# Altium PCB MB1180.PcbDoc
Units mil, origin at the board's own origin, x right, y up, seen from the top; angles counter-clockwise.
Board outline 730 x 1980 mil, 4 copper layers (Top Layer, GND, PWR, Bottom Layer); 91 components, 82 nets, 344 pads, 162 vias.
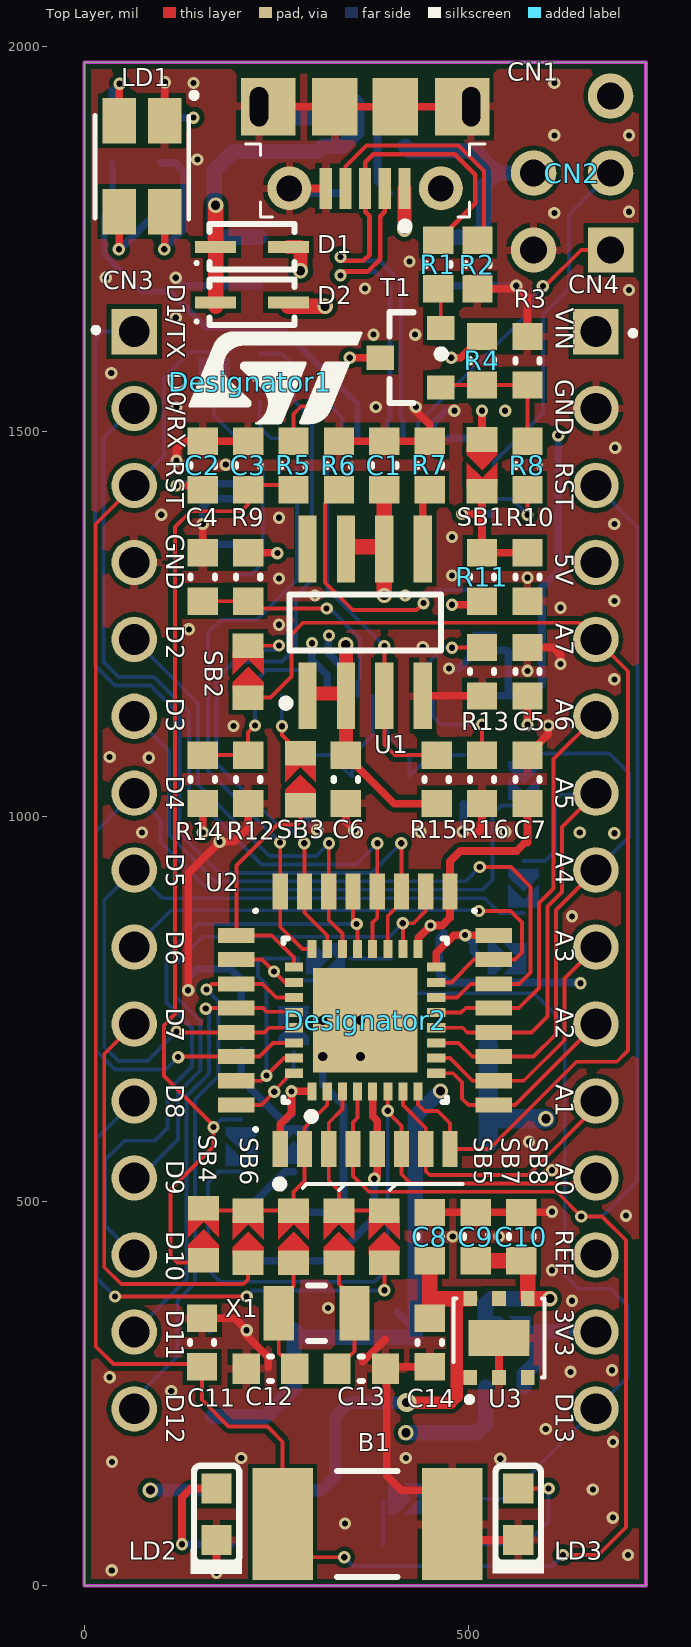
[diagram p0: Top Layer view]
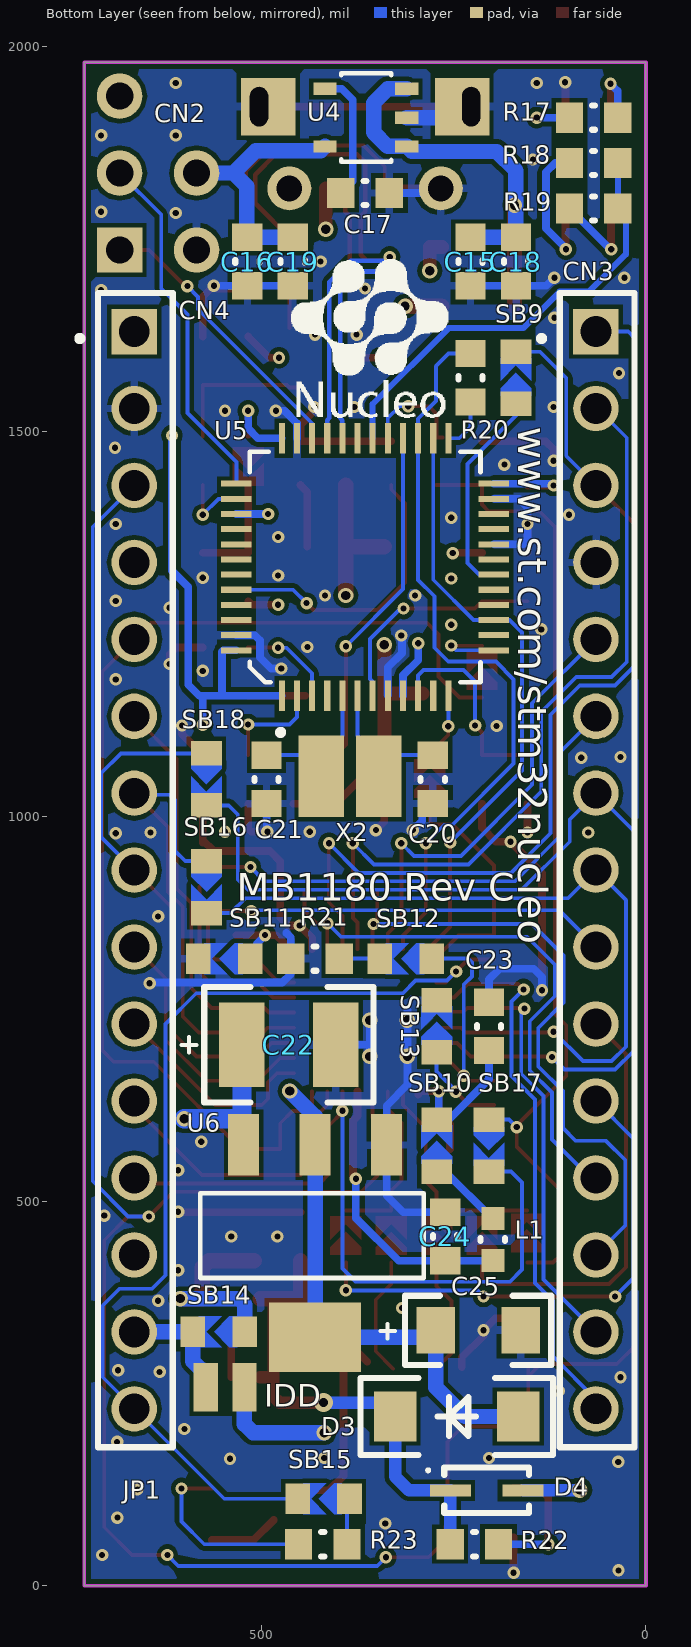
[diagram p1: Bottom Layer view, seen from below]
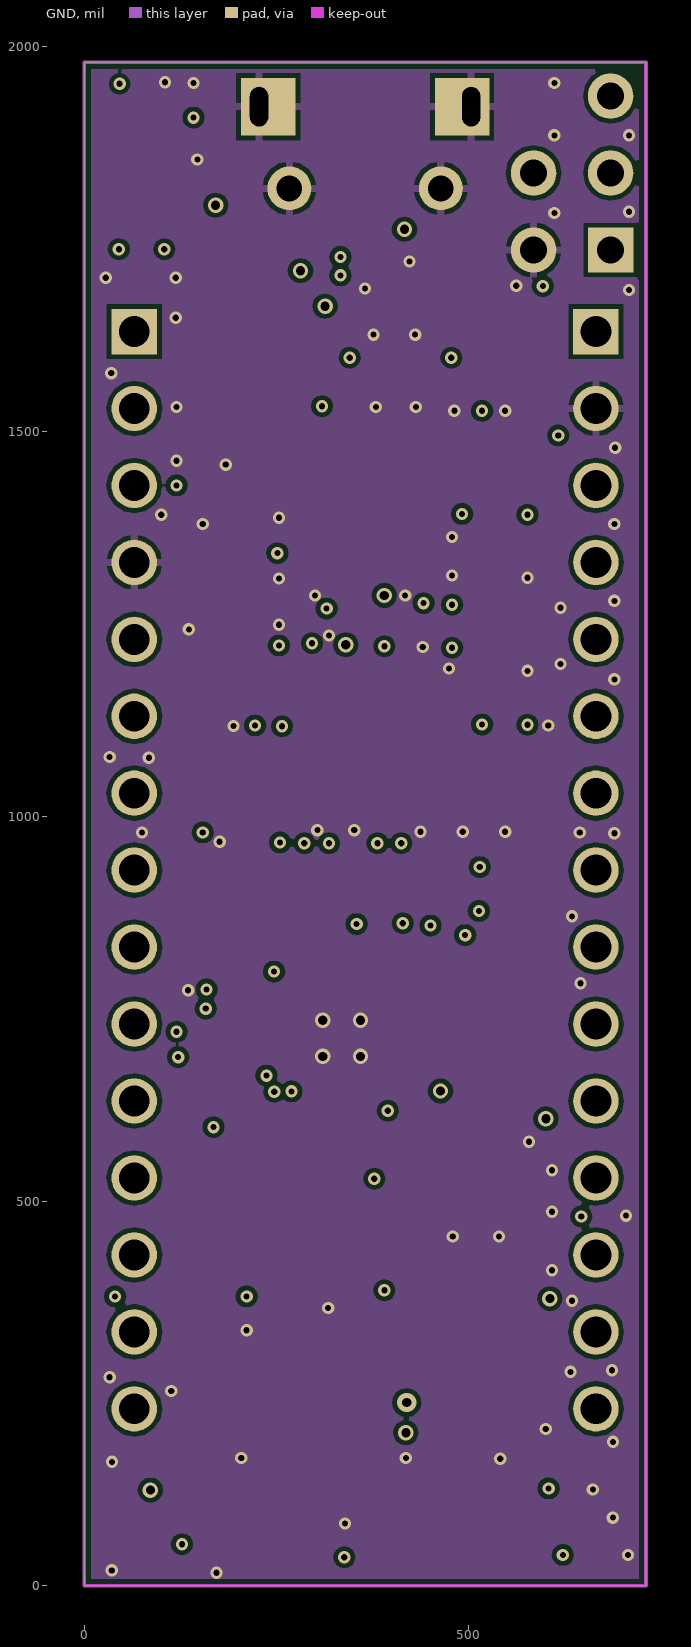
[diagram p2: GND]
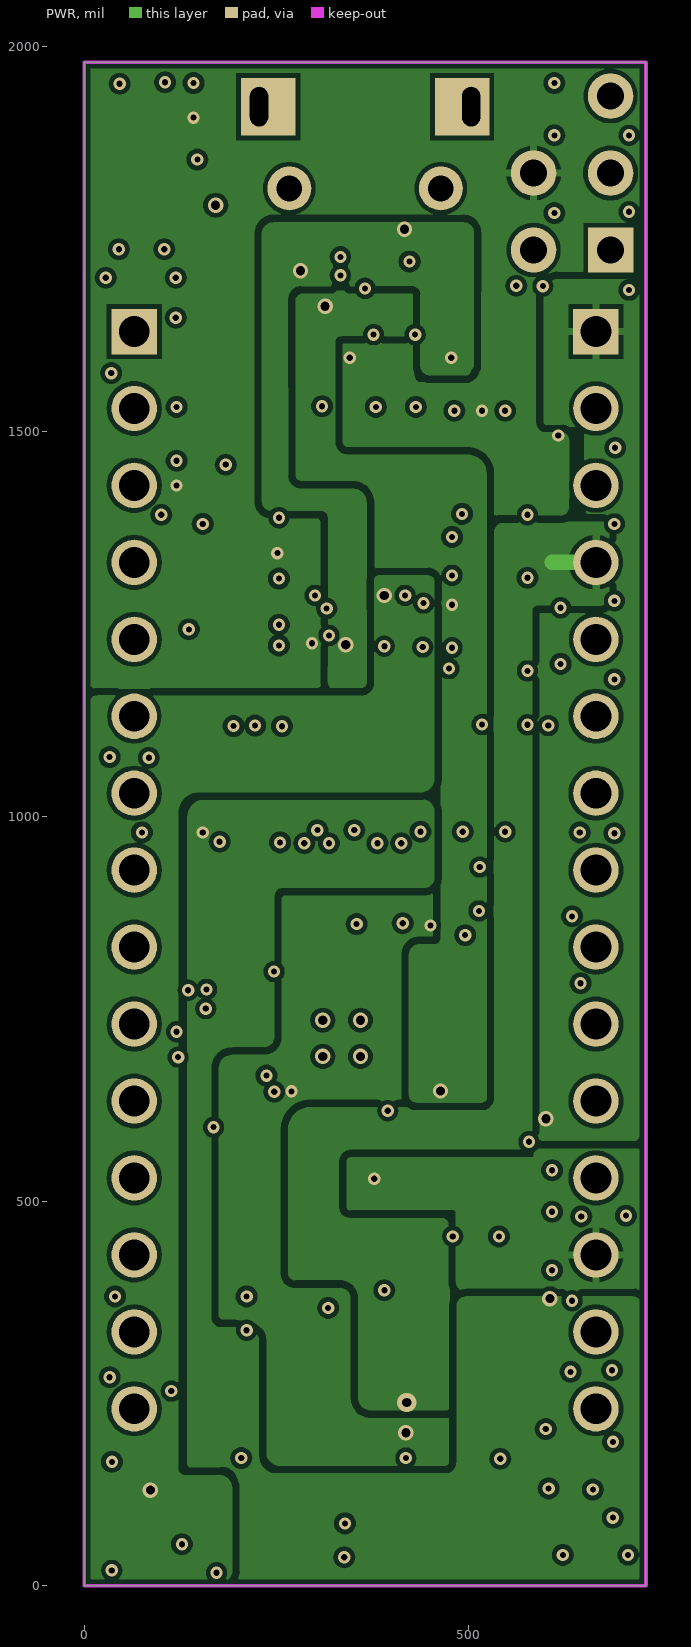
[diagram p3: PWR]

## Layer stack, top to bottom
Top Layer: signal copper 1.4
Dielectric: core 12.6, FR-4, Dk 4.8
GND: signal copper 1.4
Dielectric: prepreg 12.6, FR-4, Dk 4.8
PWR: signal copper 1.4
Dielectric: core 12.6, FR-4, Dk 4.8
Bottom Layer: signal copper 1.4

## Board outline
0,0 730,0 730,1980 0,1980

## Design rules (kind name [scope] priority, off if disabled: settings)
Clearance pad [(ObjectKind = 'Pad') And (Component = 'B1') vs (ObjectKind = 'Track') And (Layer = 'KeepOutLayer')] p1: gap=4
Clearance Polygon [(InPoly) vs (InPoly)] p2: gap=10
Clearance SB [HasFootprint('SB_DIP')] p3: gap=5
Clearance [All] p4: gap=6
Clearance Keepout [(InPoly) vs (ObjectKind = 'Track') And (Layer = 'KeepOutLayer')] p5: gap=4
DiffPairsRouting [All] p1: maxlimit=10 minlimit=6 mostfreqgap=10 toplayer_prefgap=8 midlayer1_mingap=10 midlayer2_mingap=10 bottomlayer_prefgap=8 maxuncoupledlength=500
FabricationTestPointUsage TestPointUsage [All] p1: valid=0 allowmultiple=FALSE
FabricationTestpoint Testpoint [(IsPad And (OnTopLayer Or OnBottomLayer))] p1: side=3 testpointundercomponent=TRUE minsize=40 maxsize=100 preferedsize=60 minholesize=0 maxholesize=40 preferedholesize=32 testpointgrid=1 allowsidetop=TRUE allowsidebottom=TRUE usegrid=TRUE gridtolerance=0.01
HoleSize [All] p1: absolutevalues=TRUE maxlimit=150 minlimit=1 maxpercent=80.000 minpercent=20.000
MinimumSolderMaskSliver [All] p1: minsoldermaskwidth=0
PolygonConnect PolygonConnect_1 [IsVia] p1: connectstyle=Direct reliefconductorwidth=20 reliefentries=4 polygonreliefangle="90 Angle"
PolygonConnect [All] p2: connectstyle=Relief reliefconductorwidth=10 reliefentries=4 polygonreliefangle="90 Angle"
RoutingLayers [All] p1: top layer_v5=FALSE mid layer 1_v5=FALSE mid layer 2_v5=FALSE bottom layer_v5=FALSE
RoutingVias [All] p1: holewidth=8 width=16 viastyle="Through Hole" minholewidth=8 minwidth=16 maxholewidth=28 maxwidth=50
SilkToSilkClearance [All] p1: silktosilkclearance=4
SilkscreenOverComponentPads [All] p1: minsilkscreentomaskgap=4
SolderMaskExpansion [All] p1: expansion=4
Width Width_1 [InNet('VDD_MCU')] p1: maxlimit=100 minlimit=8 preferedwidth=10 minimp=50.000000 maximp=50.000000 favimp=50.000000
Width [All] p2: maxlimit=100 minlimit=5 preferedwidth=10 toplayer_prefwidth=5 midlayer1_minwidth=6 midlayer2_minwidth=6 bottomlayer_prefwidth=5 minimp=50.000000 maximp=50.000000 favimp=50.000000
20 further rules are at their usual default settings.

## Classes and differential pairs
component class U_ST_LINK_V2-1: C1 C2 C3 C4 C5 C6 C15 C16 C17 C18 C19 C20 C21 C103 C104 CN1 CN2 CN11 CN12 D1 D2 JP4 LD1 LD10 R1 R2 R3 R4 R5 R6 R7 R8 R9 R10 R11 R12 R13 R14 R15 R16 R17 R18 R19 R20 R24 R25 R26 R27 R91 R123 R194 SB1 SB2 SB3 SB9 T1 U1 U4 U5 U23 X2
component class U_MCU_32: B1 B2 C7 C8 C9 C10 C11 C12 C13 C14 C22 C23 C24 C25 C27 C30 C33 C34 CN3 CN4 D3 D4 JP1 JP2 JP3 JP6 L1 LD2 LD3 R21 R22 R23 R31 R32 R33 SB4 SB5 SB6 SB7 SB8 SB10 SB11 SB12 SB13 SB14 SB15 SB16 SB17 SB18 SB19 SB21 SB22 SB23 SB26 SB27 SB32 SB33 SB34 SB37 SB50 SB57 SB60 SB64 SB65 U2 U3 U6 X1 X3

## Components (designator, comment, footprint, x,y, rotation, side; value= is the part's Value field where it differs from the comment)
B1 "KSS221G" SW2_5R6_5R5x3R1 368,80 r0 top
C1 "100nF" 0603C 390,1456 r270 top
C2 "100nF" 0603C 154,1456 r270 top
C3 "20pF[N/A]" 0603C 213,1456 r90 top
C4 "100nF" 0603C 154,1311 r270 top
C5 "100nF" 0603C 576,1188 r270 top
C6 "4.7uF" 0603C 340,1048 r90 top
C7 "100nF" 0603C 576,1048 r90 top
C8 "100nF" 0603C 449,453.75 r270 top
C9 "1uF_X5R_0603" 0603C 509,453.75 r90 top
C10 "100nF" 0603C 568,453.75 r270 top
C11 "100nF" 0603C 153,316 r270 top
C12 "4.3pF" 0603C 242,282 r180 top
C13 "4.3pF" 0603C 360,282 r0 top
C14 "1uF_X5R_0603" 0603C 449,316 r270 top
C15 "100nF" 0603C 228,1721 r90 bottom
C16 "1uF_X5R_0603" 0603C 518,1721 r270 bottom
C17 "10nF_X7R_0603" 0603C 365,1810 r0 bottom
C18 "1uF_X5R_0603" 0603C 169,1721 r90 bottom
C19 "100nF" 0603C 459,1721 r90 bottom
C20 "10pF" 0603C 277,1048 r270 bottom
C21 "10pF" 0603C 493,1048 r270 bottom
C22 "10uF(25V)" TAN_B 464,703 r0 bottom
C23 "100nF" 0603C 204,727 r90 bottom
C24 "100nF" 0603C 261,454 r90 bottom
C25 "10uF" TAN_A 218,332 r0 bottom
CN1 "1050170001" Molex_1050170001 365,1816 r180 top locked
CN2 "[N/A]" HDR_1x5_2R54_V_M 684,1736 r90 top
CN3 "Header 15X1_male" HDR_1x15_2R54_V_F 65,1630 r270 bottom locked
CN4 "Header 15X1_male" HDR_1x15_2R54_V_F 665,1630 r270 bottom locked
D1 "BAT60JFILM" SOD-323 218,1740 r180 top
D2 "BAT60JFILM" SOD-323 218,1668 r180 top locked
D3 "STPS2L30A" SMA 246,220 r0 bottom
D4 "BAT60JFILM" SOD-323 207,124 r0 bottom
Designator1 "Comment" ST_LOGO_5mm 216,1565 r0 top
Designator2 "Comment" QFN50P530X530X160-32N 365,735 r90 top locked
JP1 "PH127H10102JNG-2/3/1.5" HDR_1x2_1R27_R_M 547.03,209 r180 bottom locked
L1 "BEAD" 0603L 199,450 r270 bottom
LD1 "LD_BICOLOR_CMS" HSMF-A201 75,1845 r270 top locked
LD2 "RED" 0603D_R 172,93 r90 top
LD3 "Green" 0603D_G 564,93 r90 top
R1 "1K5" 0603R 460,1717 r270 top
R2 "100K" 0603R 511,1717 r270 top
R3 "36K" 0603R 576,1592 r270 top
R4 "10K" 0603R 517,1592 r90 top
R5 "100" 0603R 272,1456 r270 top
R6 "100K" 0603R 331,1456 r270 top
R7 "2.7K" 0603R 449,1456 r90 top
R8 "100" 0603R 576,1456 r270 top
R9 "100K" 0603R 213,1311 r90 top
R10 "4K7" 0603R 576,1311 r270 top
R11 "2K7" 0603R 517,1311 r90 top
R12 "4K7" 0603R 213,1048 r90 top
R13 "10K[N/A]" 0603R 517,1188 r90 top
R14 "4K7" 0603R 154,1048 r90 top
R15 "10K" 0603R 458,1048 r90 top
R16 "10K" 0603R 517,1048 r90 top
R17 "0" 0603R 68,1908 r0 bottom
R18 "100" 0603R 68,1849 r0 bottom
R19 "100" 0603R 68,1790 r0 bottom
R20 "100" 0603R 228,1570 r90 bottom
R21 "10K" 0603R 430,815 r0 bottom
R22 "1K" 0603R 223,54 r0 bottom
R23 "510" 0603R 420,54 r180 bottom
SB1 "Circuit Breaker (open)" SB_0603 517,1456 r90 top
SB2 "Circuit Breaker (close)" SB_0603 213,1188 r270 top
SB3 "Circuit Breaker (close)" SB_0603 281,1048 r270 top
SB4 "Circuit Breaker (open)" SB_0603 155,457 r270 top
SB5 "Circuit Breaker" SB_0603 272,453.75 r270 top
SB6 "Circuit Breaker" SB_0603 213,453.75 r270 top
SB7 "Circuit Breaker" SB_0603 331,453.75 r270 top
SB8 "Circuit Breaker" SB_0603 390,453.75 r270 top
SB9 "Circuit Breaker (close)" SB_0603 169,1570 r270 bottom
SB10 "Circuit Breaker (close)" SB_0603 272,572 r270 bottom
SB11 "Circuit Breaker (close)" SB_0603 548,815 r180 bottom
SB12 "Circuit Breaker (close)" SB_0603 312,815 r180 bottom
SB13 "Circuit Breaker (close)" SB_0603 272,727 r270 bottom
SB14 "Circuit Breaker (close)" SB_0603 555,330 r180 bottom
SB15 "Circuit Breaker (close)" SB_0603 419,113 r180 bottom
SB16 "Circuit Breaker (open)" SB_0603 571,908 r90 bottom locked
SB17 "Circuit Breaker (open)" SB_0603 204,572 r90 bottom
SB18 "Circuit Breaker (open)" SB_0603 571.25,1048 r90 bottom locked
T1 "9013" SOT23-3 424,1596 r90 top
U1 "ST890CDR" SO-8 365,1252 r90 top
U2 "MCU_LQFP32/QFN32" LQFP32_0R5_7x7 365,735 r0 top locked
U3 "LD39050PU33R" DFN6_0R95_3x3_TP 539,322 r0 top locked
U4 "LD3985M33R" SOT23-5L 364,1908 r0 bottom
U5 "STM32F103CBT6" LQFP48_0R5_7x7 365,1324 r180 bottom locked
U6 "LD1117S50TR" SOT-223 430,448 r270 bottom
X1 "NX3215SA-32.768K-EXS00A-MU00525" XTAL_2SM_3R2X1R5 302,354 r0 top locked
X2 "NX3225GD 8MHz EXS00A-CG04874" XTAL_2SM_3R2x2R5 347,1052 r0 bottom

## Footprints (in the part's own frame and the unit in brackets; to place one, negate y for a bottom-side part, rotate by r counter-clockwise, add the part's x,y. Pads: shape width x height; smd on the part's side, far side on the other; paste and mask are expansions set on the pad)
0603C [mm] "Chip Capacitor, Body 1.6x0.8mm, Height 1.0mm, IPC Medium Density"
  rect 0.9x1 smd: 1(-0.8,0) 2(0.8,0)
  silkscreen extent -0.05,-0.4 0.05,0.4, body extent -0.87,-0.48 0.88,0.47, height 1
0603D_G [mm] "LED, SMT, Body 1.6 x 0.8 mm, 0.25mm Thickness"
  rect 1x1 smd paste+0 mask+0: 1(0.85,0) 2(-0.85,0)
  silkscreen extent -1.96,-0.86 1.6,0.85, body extent -0.8,-0.4 0.8,0.4, height 0.25
0603D_R [mm] "LED, SMT, Body 1.6 x 0.8 mm, 0.25mm Thickness"
  rect 1x1 smd paste+0 mask+0: 1(0.85,0) 2(-0.85,0)
  silkscreen extent -1.97,-0.84 1.6,0.86, body extent -0.8,-0.4 0.8,0.4, height 0.25
0603L [mil] "Bead 0603L"
  rect 30x30 smd: 1(27.5,0) 2(-27.5,0)
  silkscreen extent -2,-16 2,16, body extent -34,-19 34,19, height 24
0603R [mm] "Chip Resistor, Body 1.6x0.8mm, IPC Medium Density"
  rect 0.9x1 smd: 1(-0.8,0) 2(0.8,0)
  silkscreen extent -0.05,-0.4 0.05,0.4, body extent -0.85,-0.47 0.85,0.47, height 0.6
DFN6_0R95_3x3_TP [mm] "500 mA low quiescent current and low noise voltage regulator"
  rect 2x1.2 smd: 0(0,0)
  rect 0.45x0.5 smd: 1(-0.95,-1.3) 2(0,-1.3) 3(0.95,-1.3) 4(0.95,1.3) 5(0,1.3) 6(-0.95,1.3)
  silkscreen extent -1.5,-2.09 1.5,1.3, body extent -1.5,-1.5 1.5,1.5, height 1
HDR_1x2_1R27_R_M [mm] "Two pins header ,1.27mm pitch, DIP"
  rect 0.8x1.6 smd: 1(-0.635,1.245) 2(0.64,1.245)
  body extent -1.27,-4.72 1.27,1.42, height 2.54
HDR_1x5_2R54_V_M [mm] "Header IDC, 2 x 4 Pin Vertical 2.54mm Pitch (Non-Boxed, Male)"
  rect 1.5x1.5 hole 0.9: 1(0,0)
  round 1.5 hole 0.9: 2(0,2.54) 3(2.54,0) 4(2.54,2.54) 5(5.08,0)
HDR_1x15_2R54_V_F [mm] "Male Header, Pitch 2.54mm, 15x1 Position, Mated Height 6mm, Tail Length 3mm"
  rect 1.5x1.5 hole 1.02: 1(0,0)
  round 1.5 hole 1.02: 2(2.54,0) 3(5.08,0) 4(7.62,0) 5(10.16,0) 6(12.7,0) 7(15.24,0) 8(17.78,0) 9(20.32,0) 10(22.86,0) 11(25.4,0) 12(27.94,0) 13(30.48,0) 14(33.02,0) 15(35.56,0)
  silkscreen extent -1.27,-1.85 36.83,1.27, body extent -1.27,-1.27 36.83,1.27, height 12.7
HSMF-A201 [mm] "LED"
  rect 1.5x1.1 smd: 1(-1.5,0.75) 2(1.5,0.75) 3(1.5,-0.75) 4(-1.5,-0.75)
  silkscreen extent -2.4,-1.55 1.75,1.78, body extent -1.6,-1.4 1.6,1.4, height 1.2
LQFP32_0R5_7x7 [mm] "LQFP32 Recommended ,32 Pin MCU Size,7x7mm, Pitch, 0.8mm"
  rect 0.5x1.2 smd: 1(-2.8,-4.25) 2(-2,-4.25) 3(-1.2,-4.25) 4(-0.4,-4.25) 5(0.4,-4.25) 6(1.2,-4.25) 7(2,-4.25) 8(2.8,-4.25) 17(2.8,4.25) 18(2,4.25) 19(1.2,4.25) 20(0.4,4.25) 21(-0.4,4.25) 22(-1.2,4.25) 23(-2,4.25) 24(-2.8,4.25)
  rect 1.2x0.5 smd: 9(4.25,-2.8) 10(4.25,-2) 11(4.25,-1.2) 12(4.25,-0.4) 13(4.25,0.4) 14(4.25,1.2) 15(4.25,2) 16(4.25,2.8) 25(-4.25,2.8) 26(-4.25,2) 27(-4.25,1.2) 28(-4.25,0.4) 29(-4.25,-0.4) 30(-4.25,-1.2) 31(-4.25,-2) 32(-4.25,-2.8)
  silkscreen extent -3.62,-5.53 3.63,3.63, body extent -3.6,-3.6 3.6,3.6, height 1.6
LQFP48_0R5_7x7 [mm] "Low & medium-density value line, advanced ARM-based 32-bit MCU"
  rect 0.2x1 smd: 1(-2.75,-4.25) 2(-2.25,-4.25) 3(-1.75,-4.25) 4(-1.25,-4.25) 5(-0.75,-4.25) 6(-0.25,-4.25) 7(0.25,-4.25) 8(0.75,-4.25) 9(1.25,-4.25) 10(1.75,-4.25) 11(2.25,-4.25) 12(2.75,-4.25) 25(2.75,4.25) 26(2.25,4.25) 27(1.75,4.25) 28(1.25,4.25) 29(0.75,4.25) 30(0.25,4.25) 31(-0.25,4.25) 32(-0.75,4.25) 33(-1.25,4.25) 34(-1.75,4.25) 35(-2.25,4.25) 36(-2.75,4.25)
  rect 1x0.2 smd: 13(4.25,-2.75) 14(4.25,-2.25) 15(4.25,-1.75) 16(4.25,-1.25) 17(4.25,-0.75) 18(4.25,-0.25) 19(4.25,0.25) 20(4.25,0.75) 21(4.25,1.25) 22(4.25,1.75) 23(4.25,2.25) 24(4.25,2.75) 37(-4.25,2.75) 38(-4.25,2.25) 39(-4.25,1.75) 40(-4.25,1.25) 41(-4.25,0.75) 42(-4.25,0.25) 43(-4.25,-0.25) 44(-4.25,-0.75) 45(-4.25,-1.25) 46(-4.25,-1.75) 47(-4.25,-2.25) 48(-4.25,-2.75)
  silkscreen extent -3.81,-5.52 3.81,3.81, body extent -3.5,-3.5 3.5,3.5, height 1.6
Molex_1050170001 [mm] "USB Micro-B Connector"
  rect 0.4x1.35 smd: 1(-1.3,0) 2(-0.65,0) 3(0,0) 4(0.65,0) 5(1.3,0)
  round 1.45 hole 0.85: 6(-2.5,0) 11(2.5,0)
  rect 1.8x1.9 hole 0.6 slot 1.3 at 90 deg copper offset 0.3,0: 7(-3.5,-2.7)
  rect 1.5x1.9 smd: 8(-1,-2.7) 9(1,-2.7)
  rect 1.8x1.9 hole 0.6 slot 1.3 at 90 deg copper offset -0.3,0: 10(3.5,-2.7)
  silkscreen extent -3.95,-1.46 3.95,1.37, body extent -4.1,-5.21 4.1,0.19, height 2.58
QFN50P530X530X160-32N [mm] "QFN, 32-Leads, Body 5.3x5.3mm (max), Pitch 0.50mm, IPC Medium Density"
  rect 0.6x0.3 smd: 1(-2.35,1.75) 2(-2.35,1.25) 3(-2.35,0.75) 4(-2.35,0.25) 5(-2.35,-0.25) 6(-2.35,-0.75) 7(-2.35,-1.25) 8(-2.35,-1.75) 17(2.35,-1.75) 18(2.35,-1.25) 19(2.35,-0.75) 20(2.35,-0.25) 21(2.35,0.25) 22(2.35,0.75) 23(2.35,1.25) 24(2.35,1.75)
  rect 0.3x0.6 smd: 9(-1.75,-2.35) 10(-1.25,-2.35) 11(-0.75,-2.35) 12(-0.25,-2.35) 13(0.25,-2.35) 14(0.75,-2.35) 15(1.25,-2.35) 16(1.75,-2.35) 25(1.75,2.35) 26(1.25,2.35) 27(0.75,2.35) 28(0.25,2.35) 29(-0.25,2.35) 30(-0.75,2.35) 31(-1.25,2.35) 32(-1.75,2.35)
  rect 3.45x3.45 smd: 33(0,0)
  silkscreen extent -3.3,-2.7 2.7,2.7
SB_0603 [mil] "Jumper"
  rect 32x40 smd: 1(33.75,0) 2(-33.75,0)
  Top Layer region: -26.25,0 -16.25,0 3.75,-20 -26.25,-20
  Top Layer region: -26.25,0 -16.25,0 3.75,20 -26.25,20
  Top Layer region: 23.75,20 13.75,20 -6.25,0 13.75,-20 23.75,-20
SMA [mm] "DIODE SCHOTTKY 30V 2A SMA"
  rect 1.4x1.64 smd: 1(-2.032,0) 2(2.032,0)
  silkscreen extent -3.17,-1.27 3.17,1.27, body extent -2.3,-1.45 2.3,1.45, height 2.45
SO-8 [mm] "1.2 A current limited high-side power switch with thermal shutdown"
  rect 2.2x0.6 smd: 1(-2.425,1.905) 2(-2.425,0.635) 3(-2.425,-0.635) 4(-2.425,-1.905) 5(2.425,-1.905) 6(2.425,-0.635) 7(2.425,0.635) 8(2.425,1.905)
  silkscreen extent -2.79,-2.5 0.93,2.74, body extent -2,-2.5 2,2.5, height 1.45
SOD-323 [mm] "Diode"
  rect 1.35x0.4 smd: 1(-1.2,0) 2(1.2,0)
  silkscreen extent -1.4,-0.75 1.88,0.75, body extent -1.35,-0.72 1.35,0.72, height 1.17
SOT23-3 [mm]
  rect 0.8x0.9 smd: 1(0.98,-1) 2(-0.98,-1) 3(0,1)
  silkscreen extent -1.5,-1.14 1.5,0.7, body extent -1.52,-0.7 1.52,0.7, height 1.11
SOT23-5L [mil] "Enhanced single channel power switches"
  rect 30x16 smd: 1(-53.15,37.4) 2(-53.15,0) 3(-53.15,-37.4) 4(53.15,-37.4) 5(53.15,37.4)
  silkscreen extent -33,-58 32,57, body extent -34,-59 34,59, height 57
SOT-223 [mil] "Adjustable and fixed low drop positive voltage regulator"
  rect 80x40 smd: 1(-125,93) 2(-125,0) 3(-125,-93)
  rect 90x120 smd: 4(125,0)
  silkscreen extent -62,-149 48,141, body extent -84,-132 62,132, height 71
ST_LOGO_5mm [mil]
  silkscreen extent -80,-55 145,65
SW2_5R6_5R5x3R1 [mm] "Subminiature Side Actuated Tact Switch for SMT"
  rect 2x3.7 smd: 1(-2.8,0) 2(2.8,0)
  silkscreen extent -1,-1.75 1,1.75, body extent -2.75,-2.7 2.75,1.75, height 1.65
TAN_A [mil] "TAN Capacitor"
  rect 50x60 smd: 1(55,0) 2(-55,0)
  silkscreen extent -95,-45 127,45, body extent -47,-35 47,35, height 39
TAN_B [mm] "Tan Capacitor"
  rect 1.5x2.8 smd: 1(1.55,0) 2(-1.55,0)
  silkscreen extent -2.79,-1.9 3.56,1.91, body extent -1.76,-1.54 1.7,1.54, height 1
XTAL_2SM_3R2X1R5 [mm] "CRYSTAL 32.768KHZ 6PF SMD 2 pads"
  rect 1x1.8 smd: 1(-1.25,0) 2(1.25,0)
  silkscreen extent -0.28,-0.91 0.28,0.91, body extent -1.63,-0.75 1.58,0.75, height 0.89
XTAL_2SM_3R2x2R5 [mm] "8M Hz 5x3.2mm"
  rect 1.5x2.7 smd: 1(0,0) 2(1.9,0)
  body extent -0.65,-1.25 2.55,1.25, height 1

## Part data
B1: library part SW-PB, "Switch"
C1 C2 C3 C4 C5 C8 C10 C15 C19 C20 C21: library part Capacitor_ST, "Capacitor 0402 / 0603 / 0805"
C6 C9 C14 C16 C18: library part "CAP SMD 0603  X5R 1µF 25V 10%", "0603  X5R 1µ"
C7 C23 C24: library part Cap, "Capacitor"
C11 C12 C13: library part CAP, "Capacitor"
C17: library part "CAP SMD 0603  X7R 10000PF 50V 10%", "0603  X7R 10NF"
C22 C25: library part "Cap Pol1", "Polarized Capacitor (Radial)"
CN2: library part "Header 3X2", "Header, 3-Pin, Dual row"
CN3 CN4: library part "Header 15X1_Female_1", "Header, 10-Pin, Single row,female"
JP1: library part JP2
L1: library part Inductor, "Inductor"
LD1: "Bicolor Led"
LD2: library part PHOTO
LD3: library part LED2, "Typical RED, GREEN, YELLOW, AMBER GaAs LED"
R1 R2 R5 R6 R8 R9 R12 R13 R14 R16 R17 R18 R19 R20 R22: library part Resistor_ST, "Resistor 0402 / 0603 / 0805"
R3 R4 R7 R10 R11 R15 R23: library part Res1, "Resistor"
R21: library part res1, "Resistor"
SB1 SB2 SB3 SB4 SB9 SB10 SB11 SB12 SB13 SB14 SB15 SB16 SB17 SB18: library part "Circuit Breaker", "Circuit Breaker"
T1: library part NPN, "NPN Bipolar Transistor"
U2: library part MCU_LQFP32
U3: library part LD39050P
U4: "Ultra low drop-low noise BiCMOS voltage, regulators low ESR capacitors compatible"
U5: "Medium-density performance line ARM-based 32-bit MCU with 64KB Flash"
U6: library part LD1117
X1: library part CRYSTAL_32K, "Crystal"
X2: library part XTAL, "Crystal Oscillator"

## Via types
v1: diameter 16, hole 8, Top Layer to Bottom Layer, tented both sides, 146 vias
v2: diameter 20, hole 12, Top Layer to Bottom Layer, tented both sides, 15 vias
v3: diameter 25, hole 12, Top Layer to Bottom Layer, tented both sides, 1 vias

## Nets (pads, with @x,y where several pads share a name; then routed paths per layer and width w, separated by ;. In a path a pad name is that pad's centre, name@x,y a point inside that pad or via, vN(x,y) a via of type N, cw(c..) or ccw(c..) an arc to the next point about the centre after c; other vN are vias at no path point)
+3V3: CN4.14 JP1.1 SB14.2 | length 155.2
  Bottom Layer w20: JP1.1 572.03,275.03 588.75,291.75 SB14.2 CN4.14
+3V3_ST_LINK: C2.2 C5.2 C16.1 C19.2 CN2.4 R9.2 R17.2 SB1.1 T1.3 U4.5 U5.1 U5.9 U5.24 U5.36 U5.48 | length 1357.5
  Top Layer w10: v1(120,1430) C2.2@153.5,1430 ; R9.2 v1@252.5,1342.5 ; v1(345,1596) T1.3 ; SB1.1@517,1495.75 v1(517,1527) ; v1(576,1119) C5.2
  Bottom Layer w10: R17.2 v1(142,1908) ; v1(120,1430) 122.27,1432.27 U5.24 ; v1(296,1225) 296,1203 315.79,1183.21 U5.9 ; U5.1 551,1156.68 ; U5.36 504.32,1491.32 517,1504 v1(517,1527) ; U5.48 549.27,1215.73 551,1214 551,1156.68 ; v1(576,1119) 576,1156.68 ; v1(616,1495) 616,1319 595,1298 595,1171 580.68,1156.68 576,1156.68 ; 551,1156.68 576,1156.68
  Bottom Layer w20: U4.5 422.75,1865 507,1865 536,1836 ; C19.2 519,1752.5 519,1819 536,1836 ; CN2.4 536,1836
  other v1: 251,1342
+5V: C8.2 C14.1 CN4.4 D3.2 D4.2 R22.2 U3.1 U3.6 | length 709.3
  Top Layer w16: v3(419,238) 476.3,238 484,245.7 484,267 ; 484,373.18 484,267 ; U3.1 487.82,270.82 484,267
  Top Layer w20: C8.2 449,367.5 454.69,373.18 484,373.18 U3.6
  PWR w20: 608,1330 CN4.4
  Bottom Layer w16: R22.2 254.5,123.75 D4.2 308,124 326,142 D3.2 344,238 v3(419,238)
AIN_1: R12.2 R14.2 U5.10 | length 267.7
  Top Layer w5: R14.2 R12.2 213,1109 v1(222,1118)
  Bottom Layer w5: v1(222,1118) 222,1175 237,1190 289,1190 296.1,1182.9 U5.10
AVDD: C24.1 CN4.13 Designator2.5 L1.1 U2.5 | length 371.8
  Top Layer w10: Designator2.5 374.84,610.16 375.53,609.47 380.75,604.24 U2.5 380.75,532.75 v1(377,529)
  Bottom Layer w10: L1.1 262.75,422.5 263,422.25 321.25,422.25 377,478 377,503.47 v1(377,529) v1@375.53,530.47
BOOT0: R21.1 SB12.2 | length 52.8
  Bottom Layer w5: SB12.2 R21.1
E5V: C25.1 D2.1 D3.1 R11.1 U6.2 U6.4 | length 801.8
  Top Layer w10: v1@478.5,1274.5 v1(478,1275) 512.5,1275 R11.1
  Top Layer w20: D2.1@265.24,1663 v2(313,1663)
  Bottom Layer w10: U6.4@406,356 U6.4@430,332
  Bottom Layer w20: D3.1 235.28,220 273,257.72 C25.1 ; C25.1@282,323 U6.4 430,332 U6.2 430,610 v2(463,643)
GND: B1.2 C1.1 C2.1 C3.2 C4.1 C5.1 C6.1 C7.2 C8.1 C9.2 C10.1 C11.1 C12.2 C13.2 C14.2 C15.1 C16.2 C17.1 C18.1 C19.1 C20.2 C21.2 C22.2 C23.2 C24.2 C25.2 CN1.5 CN1.6 CN1.7 CN1.8 CN1.9 CN1.10 CN1.11 CN2.2 CN3.4 CN4.2 Designator2.33 LD1.1 LD2.2 LD3.2 R2.2 R3.1 R6.1 R7.2 R10.2 R12.1 R13.1 R16.1 R21.2 SB11.2 SB13.2 U1.4 U3.0 U3.2 U4.2 U5.8 U5.20 U5.23 U5.35 U5.47 U6.1 | length 3825.4
  Top Layer w10: LD1.1 104.53,1953.53 v1(105,1954) ; v1(120,1462) 120,1477 130.5,1487.5 C2.1 C3.2 ; v1(135,774) 135,926 v1(176,967) 195,967 213,985 R12.1 ; C11.1 195.5,347.5 v1@210.5,332.5 ; C4.1 v1(154,1380) ; v1(172,17) LD2.2 LD2.2@172,63.04 ; v1(211,332) 211,325 239.23,296.77 239.23,284 ; CN1.10 CN1.9 CN1.8 CN1.7 ; CN1.11 CN1.5 ; R6.1 C1.1 R7.2 449,1509 431,1527 v1(431,1532) ; C6.1 340,993 v1(351,982) ; 362,291 391,320 ; C13.2@391.5,287 393,285.5 393,143 412,124 B1.2@445.24,124 ; C13.2@394,284.5 C14.2 ; CN1.6@439.8,1816 CN1.6@452.6,1803.2 ; U1.4@443.02,1156.5 R13.1 ; C8.1 C9.2 C10.1 v1@607.25,485.25 ; B1.2@483.74,85.5 509.7,59.54 LD3.2 ; v1(492,980) 513,980 517,984 R16.1 ; R2.2 557.5,1685.5 v1(561.5,1689.5) 576,1675 R3.1 ; U3.2 U3.0 ; C7.2@576,1080.09 C7.2 603,1106.5 v1(603,1118) ; C5.1 609.75,1219.5 619,1210.25 v1(619,1198)
  Bottom Layer w10: v1(100,1392) v1@101,1391 ; v1(119,1700) 129.5,1689.5 C18.1 C15.1 ; v1(135,774) 135,791 146,802 190,802 204,788 C23.2 ; C25.2 C25.2@165,334 ; U5.20 159.47,1353.53 154,1359 v1(154,1380) 154,1402 164.58,1412.58 U5.23 ; CN1.10 CN1.10@241.5,1908 ; C24.2@263,485.25 315.25,485.25 337,507 U6.1 337,624 310,651 v2(310,688) v2(310,735) 310,748 ; CN1.11 272.57,1810 C17.1 ; C20.2 290.84,1002.67 290.84,994.16 v1(303,982) ; CN1.11@277.4,1803.2 CN1.11@282.2,1808 ; v1(318,1235) 317,1234 317,1212 335.47,1193.53 U5.8 ; v2(359,688) v2(359,735) ; 361,703 C22.2 ; C22.2@402.98,735 C22.2@419.98,718 ; U5.35 453.58,1510.82 469.77,1527 v1(481,1527) ; C19.1 C16.2 v1(561.5,1689.5) ; 467.3,848.43 461.5,842.63 R21.2 461.5,794.98 472.47,784 v1@645,784 ; v1(474,1192) 487,1192 501.64,1206.64 501.64,1228.64 508.42,1235.42 U5.47 ; v1(492,980) 493,981 C21.2
  Bottom Layer w20: CN1.10@241.5,1908 U4.2
  other v1: 35.74,20 706.74,40 338.88,81 687,88.54 661,125 36,161 540.6,165 204,166 418,166 687.26,187 599.87,203.69 113,253 33,271 632,278 686,280 317,361 634,370.45 608,410 479,454 539,454 704,481 608,486 608,540 578,577 645,783 634,870 689,978 75,979 644,979 437,980 547,980 84,1076 33,1077 194,1117.27 689,1178 576,1189 440,1220 136,1243 253,1249 619,1271 689,1280 300,1287 417,1287 253,1309 576,1310 478,1313 478,1363 689,1380 253,1388 184,1457 690,1479 547,1527 120,1532 379,1532 35,1576 376,1626 430,1626 119,1648 708,1684 365,1686 28,1700 422.75,1721 611,1784 708,1785.63 147,1853.49 611,1885 708,1885 142,1953 611,1953
LED_STLINK: R18.1 R19.1 U5.30 | length 577.1
  Bottom Layer w8: R18.1 R19.1 26,1779.5 26,1730.54 74.54,1682 112,1682 159.5,1634.5 256.5,1634.5 355.16,1535.84 U5.30
MCO: C3.1 R5.2 SB4.1 SB17.1 | length 1280.1
  Top Layer w5: SB4.1@154,420 121,420 112.08,428.92 112.08,515.08 168,571 v1(168,596) 168,598 103.5,662.5 103.5,728.5 118,743 118,1376 138.5,1396.5 204.5,1396.5 213,1405 C3.1 213,1430.5 R5.2@272,1430.5
  Bottom Layer w5: v1(168,596) 177.75,605.75 SB17.1
NetC12_1: C12.1 SB5.1 X1.1 | length 154.5
  Top Layer w5: SB5.1 272,389.21 252.79,370 X1.1 252.79,307.71 252.79,302.71 C12.1
NetC13_1: C13.1 SB7.1 X1.2 | length 155.8
  Top Layer w5: C13.1 351.21,304.71 X1.2 351.21,371.79 331,392 SB7.1
NetC15_2: C15.2 C18.2 D1.2 D2.2 U4.1 U4.3 | length 571.2
  Top Layer w20: D2.2@170.76,1663 D1.2 v2(170.76,1794.24)
  Bottom Layer w20: C15.2 C18.2 169,1839 194,1864 304.25,1864 U4.1 335.6,1870.6 354,1889 354,1927 335.6,1945.4 U4.3
NetC17_2: C17.2 U4.4 | length 169.5
  Bottom Layer w10: C17.2 381,1825.5 381,1931 395.4,1945.4 U4.4
NetCN1_4: CN1.4 R2.1 | length 327.4
  Top Layer w5: CN1.4 339.41,1844.41 367,1872 486.18,1872 519.5,1838.68 519.5,1757 R2.1
NetL1_2: L1.2 SB10.1 | length 98.2
  Bottom Layer w10: L1.2 200.05,477.5 260.8,538.25 SB10.1
NetLD1_2: LD1.2 R18.2 | length 194.7
  Top Layer w10: v1@104.53,1737.47 LD1.2
  Bottom Layer w10: R18.2 118,1849 130,1837 130,1764.33 104.06,1738.39 v1(104.06,1737)
NetLD1_3: LD1.3 R19.2 | length 125.6
  Top Layer w10: v1(45,1737) 45.47,1737.47 LD1.3
  Bottom Layer w10: v1(45,1737) 46.5,1737 R19.2
NetLD1_4: LD1.4 R17.1 | length 101
  Top Layer w10: LD1.4 45.47,1951.47 v1(46,1952)
  Bottom Layer w10: R17.1@39.94,1911.44 R17.1 36.5,1942.5 v1(46,1952)
NetLD2_1: LD2.1 R22.1 | length 175.3
  Top Layer w10: v1(127,54) 127,115 138.47,126.47 LD2.1
  Bottom Layer w10: v1(127,54) R22.1
NetLD3_1: LD3.1 R23.1 | length 246.7
  Top Layer w5: LD3.1 v1(603.54,126.47)
  Bottom Layer w5: R23.1 574,54 603.54,83.54 v1(603.54,126.47)
NetR1_2: R1.2 T1.1 | length 64.5
  Top Layer w5: R1.2@451.37,1676.87 R1.2 463.37,1682.13 T1.1
NetR3_2: R3.2 R4.1 R8.1 T1.2 | length 192.9
  Top Layer w5: T1.2@451.37,1557.42 T1.2 466.46,1560.5 R3.2 R8.1@576,1493.5
NetR5_1: R5.1 U5.29 | length 137.7
  Top Layer w5: R5.1@264,1492.5 R5.1@272,1492.5 ; R5.1@272,1493.5 272,1523 282,1533 v1(309,1533)
  Bottom Layer w5: v1(309,1533) 320,1533 335.47,1517.53 U5.29
NetR6_2: R6.2 U5.44 | length 379.2
  Top Layer w5: R6.2@331,1430.5 R6.2 313,1406.5 313,1304 349,1268 432,1268 v1(441,1277)
  Bottom Layer w5: v1(441,1277) 458.47,1294.47 U5.44
NetR7_1: R7.1 U1.5 | length 83.8
  Top Layer w10: U1.5@440,1350.47 440,1421.5 R7.1@449,1430.5
NetR10_1: R10.1 R11.2 SB1.2 U5.39 | length 211.1
  Top Layer w10: v1(491,1393) 516,1393 ; SB1.2@517,1428.25 R11.2 R10.1
  Bottom Layer w5: v1(491,1393) v1@491.1,1392.9
  Bottom Layer w10: v1@491.1,1392.9 U5.39
NetR13_2: R13.2 U5.3 | length 126.2
  Top Layer w5: v1(478,1219) 478.5,1219.5 R13.2
  Bottom Layer w5: U5.3 433.9,1185.9 467,1219 v1(478,1219)
NetR16_2: R16.2 U5.2 | length 134.9
  Top Layer w5: R16.2 v1(517,1119.28)
  Bottom Layer w5: U5.2 453.58,1129 463.31,1119.28 v1(517,1119.28)
NetR23_2: R23.2 SB15.1 | length 55.7
  Bottom Layer w5: R23.2 SB15.1@388.5,109.75
NetSB4_2: Designator2.2 SB4.2 SB5.2 SB6.2 U2.2 | length 295.3
  Top Layer w5: SB4.2@154.75,487.5 SB6.2 ; SB6.2@209.5,484 SB6.2 ; Designator2.2 315.79,624.79 286.26,595.26 U2.2 286.26,526 272,511.74 SB5.2 SB6.2
NetSB7_2: Designator2.3 SB7.2 SB8.2 U2.3 | length 226.8
  Top Layer w5: Designator2.3 335.47,619.47 317.76,601.76 U2.3 317.76,527 331,513.76 SB7.2 SB8.2
NetSB11_1: Designator2.16 SB11.1 U2.16 | length 182.6
  Top Layer w10: Designator2.16 457.52,822.52 480.56,845.56 v1(495,845.56) ; U2.16@532,845.56 v1(495,845.56) ; U2.16 495.32,845.24 v1(495,845.56)
  Bottom Layer w10: v1(495,845.56) 506,834.56 506,824.25 514.25,816 SB11.1@514.25,811
NetSB12_1: Designator2.31 SB12.1 U2.31 | length 295.6
  Top Layer w5: U2.31 230.06,656.26 v1(236.8,663) 259.59,685.79 Designator2.31
  Bottom Layer w5: v1(236.8,663) 236.8,781.2 226,792 226,810 231,815 SB12.1 ; SB12.1@278.25,808.25 SB12.1@278.25,811
NetSB13_1: Designator2.32 SB13.1 U2.32 | length 166
  Top Layer w5: U2.32 230.14,624.76 v1@244.93,639.56 ; v1(247,642) 247,641.62 v1@244.93,639.56 ; Designator2.32 269.58,666.1 244.93,641.46 v1@244.93,639.56
  Bottom Layer w5: v1(247,642) 247,641.62 244.93,639.56 244.93,641.46 272,668.53 272,673.5 SB13.1 SB13.1@273,692.25
NRST: B1.1 C11.2 CN3.3 CN4.3 Designator2.4 SB9.2 U2.4 | length 4199.6
  Top Layer w5: CN3.3 15,1380 15,311 38,288 137,288 C11.2@153,272 ; C11.2 C11.2@153,272 ; v1(338,37) 282.4,37 260.76,58.64 260.76,77 B1.1 257.76,187.24 238,207 187.68,207 153,241.68 C11.2@153,272 ; Designator2.4 355.16,608.16 349.25,602.25 U2.4 349.25,532.75 370,512 614,512 v1(646,480) 673,480 704,449 704,76 668,40 v1(622,40)
  Bottom Layer w5: CN3.3 103.5,1468.5 103.5,1569.5 137.75,1603.75 SB9.2 ; v1(338,37) 349.18,25.82 607.82,25.82 v1(622,40) ; v1(646,480) 673,480 719,526 719,1376 CN4.3
OSC_IN: C21.1 U5.5 X2.2 | length 198
  Bottom Layer w5: U5.5 394.53,1104.72 422.8,1076.45 422.8,1052 450.3,1079.5 C21.1
OSC_OUT: C20.1 U5.6 X2.1 | length 197.2
  Bottom Layer w5: C20.1 319.5,1079.5 X2.1 ; X2.1@348,1052 348,1078 374.84,1104.84 U5.6
PA0: CN4.12 Designator2.6 SB17.2 U2.6 | length 989.7
  Top Layer w5: Designator2.6 v1(394.53,617.33) 394.53,615.47 412.24,597.76 U2.6 412.24,534.76 424,523 658,523 CN4.12
  Bottom Layer w5: SB17.2 175.25,538.25 161,524 161,411 177,395 209,395 377,395 394.53,412.53 v1(394.53,617.33)
PA1: CN4.11 Designator2.7 U2.7 | length 383.3
  Top Layer w5: Designator2.7 414.21,624.79 443.74,595.26 U2.7 443.74,539.26 449,534 577,534 665,622 CN4.11
PA2: CN4.5 Designator2.8 SB2.1 U2.8 | length 1471.4
  Top Layer w5: SB2.1 242.25,1154.25 269.5,1181.5 269.5,1236.5 284.5,1251.5 643.5,1251.5 CN4.5 706.5,1188.5 706.5,695.5 692,681 639.67,681 526.34,567.68 U2.8 475.24,601.14 459.38,617 442,617 433.9,625.1 Designator2.8
PA3: CN4.10 Designator2.9 U2.9 | length 280.8
  Top Layer w5: Designator2.9 479.34,666.1 491,654.44 491,633 499.24,624.76 U2.9 559.76,624.76 CN4.10
PA4: CN4.9 Designator2.10 U2.10 | length 338.5
  Top Layer w5: Designator2.10 475.21,685.79 504.74,656.26 U2.10 571.26,656.26 624,709 624,789 CN4.9
PA5: CN4.8 Designator2.11 SB18.1 U2.11 | length 717.5
  Top Layer w5: Designator2.11 486.53,705.47 504.24,687.76 U2.11 584,687.76 613,716.76 613,878 CN4.8
  Bottom Layer w5: SB18.1 682.25,1081.75 708,1056 708,973 CN4.8 CN4.8@653.25,941.75
PA6: CN4.7 Designator2.12 SB16.1 U2.12 | length 640.8
  Top Layer w5: Designator2.12 491.84,725.16 497.75,719.25 U2.12 581.25,719.25 602,740 602,882.56 621,901.56 621,986 CN4.7
  Bottom Layer w5: SB16.1 598.75,941.75 612,955 612,1021 619,1028 663,1028 CN4.7
PA7: CN4.6 Designator2.13 U2.13 | length 530.5
  Top Layer w5: Designator2.13 489.84,744.84 495.75,750.75 U2.13 564.75,750.75 591,777 591,887.11 610,906.11 610,1074.4 665,1129.4 CN4.6
PA8: CN3.12 Designator2.18 U2.18 | length 743.8
  Top Layer w5: Designator2.18 414.21,860.79 v1(414,861) 428,861 443.74,876.74 U2.18
  Bottom Layer w5: CN3.12 72,530 122,580 122,641 151,670 151,733.67 118.5,766.17 118.5,807.5 154.5,843.5 396.5,843.5 v1(414,861)
PA9: CN3.1 Designator2.19 U2.19 | length 1240.4
  Top Layer w5: Designator2.19 394.53,870.53 412.24,888.24 U2.19 412.24,964.76 v1(412,965)
  Bottom Layer w5: CN3.1 23,1630 14,1621 14,1196 40,1170 86,1170 124,1132 124,978 175.5,926.5 373.5,926.5 v1(412,965)
PA10: CN3.2 Designator2.20 U2.20 | length 1024.2
  Top Layer w5: Designator2.20 374.84,861.84 380.75,867.75 U2.20 380.75,964.75 v1(381,965)
  Bottom Layer w5: CN3.2 63,1530 25,1492 25,1200.56 44.56,1181 90.56,1181 136,1135.56 136,1032 230.5,937.5 353.5,937.5 v1(381,965)
PA11: CN3.13 Designator2.21 U2.21 | length 829.5
  Top Layer w5: U2.21 349.25,865.75 355.16,859.84 Designator2.21
  Bottom Layer w5: CN3.13 26.97,468.03 26.97,553.22 52,578.25 91.25,578.25 108,595 108,643 140,675 140,725 107,758 107,819 148,860 v1(354,860)
PA12: CN3.5 Designator2.22 U2.22 | length 583.4
  Top Layer w5: v1(318,965) 317.76,964.76 U2.22 317.76,865.24 335.47,847.53 Designator2.22
  Bottom Layer w5: CN3.5 148,1147 148,1041 240.5,948.5 301.5,948.5 v1(318,965)
PA13: Designator2.23 R20.2 U2.23 U5.27 | length 972.4
  Top Layer w5: v1(286,965) 286.26,964.74 U2.23 286.26,874.74 315.79,845.21 Designator2.23
  Bottom Layer w5: R20.2 256.5,1601.5 273,1585 273,1539.72 296.1,1516.62 U5.27 296.1,1307.1 275,1286 275,1219 257,1201 195,1201 172,1178 172,1068.42 251.47,988.94 262.06,988.94 v1(286,965)
PA14: Designator2.24 U2.24 U5.15 U5.26 | length 802.5
  Top Layer w5: v1(254.5,966) 254.76,965.73 U2.24 254.76,856.24 283.48,827.52 Designator2.24
  Bottom Layer w5: v1(254.5,966) 161,1059.5 161,1239 177.1,1255.1 U5.15 224.1,1255.1 276.42,1307.42 U5.26
PA15: Designator2.25 SB3.1 U2.25 | length 318.3
  Top Layer w5: Designator2.25 272.48,816.52 243.76,845.24 U2.25 197.68,935.99 251.18,989.5 277.5,989.5 281,993 SB3.1
PB0: CN3.6 Designator2.14 U2.14 | length 933.3
  Top Layer w5: Designator2.14 484.53,764.53 502.24,782.24 U2.14 565.24,782.24 580,797 580,908.44 554.44,934 v1(514,934)
  Bottom Layer w5: CN3.6 110,1085 110,976 170.5,915.5 495.5,915.5 v1(514,934)
PB1: CN3.9 Designator2.15 U2.15 | length 697.1
  Top Layer w5: Designator2.15 477.21,784.21 506.74,813.74 U2.15 559.74,813.74 569,823 569,862 554,877 v1(513,877)
  Bottom Layer w5: CN3.9 113,878 512,878 v1(513,877)
PB3: CN4.15 Designator2.26 SB15.2 U2.26 | length 1329.2
  Top Layer w5: U2.26 231.19,813.74 v1(246.67,798.26) 260.72,784.21 Designator2.26
  Bottom Layer w5: v1(246.67,798.26) 258.46,786.47 299.28,786.47 315.75,770 584.5,770 624.5,730 624.5,403.5 642,386 684,386 706,364 706,271 CN4.15 548,113 SB15.2
PB4: CN3.15 Designator2.27 U2.27 | length 720.6
  Top Layer w5: v1(159,775) 166.24,782.24 U2.27 231.76,782.24 249.47,764.53 Designator2.27
  Bottom Layer w5: CN3.15 65,242.26 121,298.26 121,370.44 144,393.44 144,631.89 174.5,662.39 174.5,759.5 v1(159,775)
PB5: CN3.14 Designator2.28 U2.28 | length 578.2
  Top Layer w5: v1(158,750) 159.24,750 159.99,750.75 U2.28 232.25,750.75 237,746 Designator2.28@271.32,746
  Bottom Layer w5: CN3.14 133,398 133,636.44 162,665.44 162,747.24 159.24,750 v1(158,750)
PB6: CN3.8 Designator2.29 SB16.2 U2.29 | length 1046.3
  Top Layer w5: v1@120.75,719.25 U2.29 234.25,719.25 240.16,725.16 Designator2.29
  Bottom Layer w5: v1(120,720) 82,682 44.56,682 26,700.56 26,891 CN3.8 101.5,893.5 520.5,893.5 539.75,874.25 SB16.2
PB7: CN3.7 Designator2.30 SB18.2 U2.30 | length 1306.2
  Top Layer w5: v1@122.76,687.76 U2.30 227.76,687.76 245.47,705.47 Designator2.30
  Bottom Layer w5: v1(122,687) 106,671 40,671 15,696 15,980 CN3.7 99,996 99,967 161.5,904.5 327.5,904.5 517.5,904.5 530.5,917.5 530.5,1002.5 542.25,1014.25 SB18.2
PF0: CN3.10 SB6.1 | length 552.8
  Top Layer w5: CN3.10 26,691 26,414 48.03,391.97 203.64,391.97 204.17,392.5 207.5,392.5 213,398 SB6.1
PF1: CN3.11 SB8.1 | length 675
  Top Layer w5: v1@41,375 v1(40,376) v1(211,376) ; v1(390,384) SB8.1
  Bottom Layer w5: v1(40,376) 15.97,400.03 15.97,580.97 CN3.11 ; v1(211,376) 218.75,383.75 389.75,383.75 v1(390,384)
PWR_ENN: R15.2 U1.3 U5.28 | length 502.7
  Top Layer w5: v1(390,1221) 390,1159.53 390,1093 403.5,1079.5 R15.2
  Bottom Layer w5: U5.28 315.79,1295.21 v1(390,1221)
STLINK_RX: SB2.2 U5.13 | length 97.7
  Top Layer w5: SB2.2 v1@252.75,1221.75
  Bottom Layer w5: U5.13 246.73,1215.73 v1(253,1222)
STLINK_TX: SB3.2 U5.12 | length 85
  Top Layer w5: v1(257,1117) 257,1105.75 SB3.2
  Bottom Layer w5: U5.12 256.73,1117.27 v1(257,1117)
STM_JTCK: CN2.3 U5.37 | length 466.6
  Bottom Layer w5: U5.37 532.32,1460.32 596,1524 596,1652 630,1686 630,1782 CN2.3
STM_JTMS: CN2.1 U5.34 | length 372.3
  Top Layer w5: v1(596,1689) 599,1689 646,1736 CN2.1
  Bottom Layer w5: U5.34 433.9,1510.9 582,1659 582,1675 v1(596,1689)
STM_RST: C4.2 R9.1 U5.7 | length 300.1
  Top Layer w5: C4.2 R9.1 222.5,1270 v1(315,1270)
  Bottom Layer w5: v1(315,1270) 319.16,1270 358.5,1230.66 358.5,1178.5 355.16,1175.16 U5.7
T_JTDI: U5.17
T_JTDO: U5.16
T_NRST: SB9.1 U5.18 | length 293.8
  Bottom Layer w5: 169,1556.25 169,1521 232,1458 232,1329 217.16,1314.16 U5.18
T_SWDIO_IN: R20.1 U5.25 | length 67.3
  Bottom Layer w5: R20.1 228,1506 242.68,1491.32 U5.25
T_SWO: U5.31
U5V: C6.2 CN1.1 D1.1 R4.2 R15.1 U1.1 U1.2 | length 488.9
  Top Layer w10: C6.2 402.99,1016.5 R15.1 ; v1(477,1596) 489.5,1596 R4.2
  Top Layer w18: D1.1 281,1740 v2(281,1709) ; U1.1@290,1159.53 U1.2@340,1159.53 ; C6.2 U1.2@340,1159.53 ; v2(340,1223) U1.2@340,1159.53 ; v2(416.18,1762.82) CN1.1
U5V_ST_LINK: C1.2 D4.1 U1.6 U1.7 | length 267.4
  Top Layer w20: U1.7@340,1350.47 U1.6@390,1350.47 ; v2(390,1287) U1.6@390,1350.47 ; C1.2@390,1430.5 U1.6@390,1350.47
  Bottom Layer w16: v2(86,124.34) 86.34,124 D4.1
USB_DM: CN1.2 U5.32 | length 427.7
  Top Layer w6: v1(333,1703) 338,1708 368.59,1708 384.8,1724.2 384.8,1780.06 390.59,1785.85 CN1.2
  Bottom Layer w6: v1(333,1703) 338,1708 378,1708 397.37,1688.63 397.37,1517.69 394.53,1514.85 U5.32
USB_DP: CN1.3 R1.1 U5.33 | length 725.4
  Top Layer w6: v1(333,1727) 338,1722 362.8,1722 370.8,1730 370.8,1780.06 365,1785.85 CN1.3 365,1850 375.5,1860.5 481.42,1860.5 508,1833.92 508,1796.5 R1.1
  Bottom Layer w6: v1(333,1727) 338,1722 383.8,1722 411.37,1694.43 411.37,1517.69 414.21,1514.85 U5.33
USB_RENUMN: R8.2 U5.38 | length 91.5
  Top Layer w5: v1(576,1392) R8.2@576,1430.5
  Bottom Layer w5: U5.38@532.91,1412 U5.38 555.42,1412.58 v1(576,1392)
VDD: C7.1 C23.1 Designator2.1 Designator2.17 JP1.2 SB10.2 U2.1 U2.17 | length 728.5
  Top Layer w10: U2.1 254.76,599.78 269.29,614.3 v1(269.29,642.48) Designator2.1 Designator2.1@296.1,638.1 ; Designator2.17 433.9,841.9 v1(450,858) 465,858 475.24,868.24 U2.17 475.24,941.24 489,955 561.94,955 576,969.06 ; 576,966 576,969.06 ; C7.1 576,969.06
  Bottom Layer w10: C23.1 204,658.13 256.38,605.75 263,605.75 269.29,612.04 v1(269.29,642.48) ; v1@449.75,857.75 v1(450,858)
  Bottom Layer w20: v2(418,199) 510.73,199 521.8,210.07 JP1.2
VIN: C22.1 CN4.1 U6.3 | length 199
  Bottom Layer w25: U6.3@525.02,575.98 C22.1 ; U6.3@528,607 v2(600,607)
VO: C9.1 C10.2 R14.1 SB14.1 U3.4 | length 300.3
  Top Layer w10: v1(154,979) R14.1
  Top Layer w20: C9.1 C10.2 576.4,413.85 U3.4 v2(605.18,373.18)
  Bottom Layer w20: SB14.1 521.25,365.25 529.18,373.18 v2(605.18,373.18)
pads on no net: CN2.5 U1.8 U3.3 U3.5 U5.4 U5.11 U5.14 U5.19 U5.21 U5.22 U5.40 U5.41 U5.42 U5.43 U5.45 U5.46

## Polygon pours and split planes (outlines as drawn)
U5V_ST_LINK on PWR "ST_5V" (solid, remove dead copper, pour order 16): 382,1313 ccw(c382,1308) 377,1308 377,1173 cw(c361,1173) 361,1157 17,1157 ccw(c17,1147) 7,1147 6.7,15.96 ccw(c17.96,15.96) 17.96,4.7 177.54,4.67 ccw(c177.54,19.46) 192.33,19.46 192,127 ccw(c175,127) 175,144 131,144 cw(c131,153) 122,153 122,1004 cw(c149,1004) 149,1031 437,1031 ccw(c437,1049) 455,1049 455,1305 ccw(c447,1305) 447,1313
VO on PWR "VO" (solid, remove dead copper, pour order 18): 157,1022 ccw(c157,999) 134,999 134,158 ccw(c138,158) 138,154 181,154 cw(c181,136) 199,136 198.95,11.95 ccw(c205.95,11.95) 205.95,4.95 711.51,4.49 ccw(c711.51,16.49) 723.51,16.49 724,365 ccw(c713,365) 713,376 496,376 ccw(c496,364) 484,364 484,161 cw(c469,161) 469,146 250,146 cw(c250,169) 227,169 227,318 ccw(c209,318) 209,336 178,336 cw(c178,349) 165,349 165.09,672.91 cw(c192.09,672.91) 192.09,699.91 233.81,700.19 ccw(c233.81,713.19) 246.81,713.19 247,896 cw(c258,896) 258,907 442,907 ccw(c442,920) 455,920 455,1006 ccw(c439,1006) 439,1022
VDD on PWR "VDD" (solid, remove dead copper, pour order 24): 454.31,901 cw(c454.31,896.25) 459.05,896.25 459.05,848.05 cw(c451,848.05) 451,840 427,840 ccw(c427,828) 415,828 415,633 cw(c409,633) 409,627 282,627 ccw(c282,608) 263,608 263,396 ccw(c270,396) 270,389 335,389 cw(c335,382) 342,382 cw(c342,373) 351,373 351,233 ccw(c363,233) 363,221 469,221 cw(c469,215) 475,215 475,161 cw(c470,161) 470,156 255,156 cw(c255,175) 236,175 236,317 ccw(c208,317) 208,345 183,345 cw(c183,354) 174,354 173.56,669.44 cw(c195.56,669.44) 195.56,691.44 234.15,691.85 ccw(c234.15,712.85) 255.15,712.85 255,887 cw(c269,887) 269,901
+3V3_ST_LINK on PWR "ST_3V3" (solid, remove dead copper, pour order 20): 636,1974 12,1974 ccw(c12,1968) 6,1968 6,1176 ccw(c16,1176) 16,1166 299,1166 ccw(c299,1178) 311,1178 311,1372 ccw(c292,1372) 292,1391 233,1391 cw(c233,1399) 225,1399 225,1766 cw(c237,1766) 237,1778 498,1778 cw(c498,1762) 514,1762 514,1581 cw(c497,1581) 497,1564 438,1564 cw(c438,1573) 429,1573 429,1609 ccw(c421,1609) 421,1617 340,1617 ccw(c340,1608) 331,1608 331,1490 ccw(c343,1490) 343,1478 503,1478 cw(c503,1451) 530,1451 530,1398 ccw(c537,1398) 537,1391 619,1391 ccw(c619,1402) 630,1402 630,1489 ccw(c620,1489) 620,1499 600,1499 cw(c600,1512) 587,1512 587,1679 cw(c616,1679) 616,1708 721,1708 ccw(c721,1715) 728,1715 728,1961 ccw(c715,1961) 715,1974
U5V on PWR "U5V" (solid, remove dead copper, pour order 17): 506,1606 506,1759 ccw(c493,1759) 493,1772 246,1772 ccw(c246,1757) 231,1757 231,1409 ccw(c243,1409) 243,1397 307,1397 cw(c307,1387) 317,1387 317,1215 317,1175 ccw(c329,1175) 329,1163 354,1163 ccw(c354,1176) 367,1176 367,1407 ccw(c348,1407) 348,1426 282,1426 cw(c282,1443) 265,1443 265,1672 cw(c282,1672) 282,1689 426,1689 cw(c426,1678) 437,1678 437,1585 ccw(c449,1585) 449,1573 495,1573 ccw(c495,1581) 503,1581 ccw(c503,1584) 506,1584 506,1645
VIN on PWR "VIN" (solid, remove dead copper, pour order 23): 615,1698 ccw(c615,1679) 596,1679 596,1514 ccw(c604,1514) 604,1506 641,1506 cw(c641,1497) 650,1497 650,1402 ccw(c662,1402) 662,1390 674,1390 cw(c674,1380) 684,1380 684,1278 cw(c678,1278) 678,1272 605,1272 ccw(c605,1255) 588,1255 588.19,589.19 ccw(c601.19,589.19) 601.19,576.19 709.1,575.9 ccw(c709.1,589.9) 723.1,589.9 723,1694 ccw(c719,1694) 719,1698
AVDD on PWR "AVDD" (solid, remove dead copper, pour order 21): 358,557 347,557 ccw(c347,551) 341,551 341,493 ccw(c346,493) 346,488 479,488 cw(c479,484) 483,484 483,395 ccw(c495,395) 495,383 716,383 ccw(c716,392) 725,392 725,561 ccw(c718,561) 718,568 593,568 ccw(c593,559) 584,559 cw(c582,559) 582,557 358,557
+5V on PWR "+5V" (solid, remove dead copper, pour order 22): 656,1383 549,1383 ccw(c549,1366) 532,1366 532,641 cw(c513,641) 513,622 294,622 ccw(c294,593) 265,593 265,406 ccw(c274,406) 274,397 333,397 cw(c333,374) 356,374 356,245 ccw(c373,245) 373,228 470,228 ccw(c470,233) 475,233 475,465 ccw(c461,465) 461,479 342,479 cw(c342,489) 332,489 332,554 cw(c343,554) 343,565 564,565 ccw(c564,583) 582,583 582,1267 cw(c589,1267) 589,1274 671,1274 ccw(c671,1285) 682,1285 682,1373 ccw(c672,1373) 672,1383
E5V on PWR "E5V" (solid, remove dead copper, pour order 19): 293,1683 ccw(c293,1662) 272,1662 272,1441 ccw(c281,1441) 281,1432 361,1432 cw(c361,1422) 371,1422 371,1322 ccw(c378,1322) 378,1315 446.98,1314.98 cw(c446.98,1297.98) 463.98,1297.98 463.05,840.95 cw(c456.05,840.95) 456.05,833.95 436,834 ccw(c436,820) 422,820 422,638 ccw(c432,638) 432,628 517,628 ccw(c517,634) 523,634 523,1445 ccw(c498,1445) 498,1470 343,1470 cw(c343,1487) 326,1487 326,1616 cw(c334,1616) 334,1624 428,1624 ccw(c428,1629) 433,1629 433,1672 ccw(c422,1672) 422,1683
GND on GND "GND" (solid, remove dead copper, pour order 14): 730,1980.06 730,-0.94 0,-0.94 0,1980.06
GND on Bottom Layer "GND" (solid, remove dead copper, pour order 13): 730,1980.06 730,-0.94 0,-0.94 0,1980.06
GND on Top Layer "GND" (solid, remove dead copper, pour order 15): 730,1980 730,-1 0,-1 0,1980

## Keep-outs
Keep-Out Layer:
  the board outline again, w5

## Other copper
Top Layer:
  pour cut-out: 423.32,277 415.21,277 415.21,275.94 423.32,275.94
Bottom Layer:
  pour cut-out: 363.25,87 363.25,79.68 368,79.68 368,87.33 369,87.33
  pour cut-out: 359.56,205.24 406.46,205.24 406.46,212 359.56,212
  pour cut-out: 550.28,220.5 543.58,220.5 543.58,225 550.06,225
  pour cut-out: 18.72,1823.31 60.22,1823.31 60.22,1815.69 18.72,1815.69
  pour cut-out: 75.78,1823.31 75.78,1815.69 123.21,1815.69 123.21,1823.31

## Silkscreen, mask and mechanical layers (free items; w line width, h text height)
Top Overlay:
  circle w8: c15.17,1632 r2.83
  circle w8: c713.17,1628 r2.83
  lines w2: 339,522 343,522
  lines w5: 284,517 289,522 291,522 405,522 ; 331,514 339,522 ; 397,514 405,522 ; 492,522 405,522
  text "D1/TX" at 100,1692 h40 r270
  text "CN3" at 24,1677 h40
  text "CN4" at 629,1672 h40
  text "VIN" at 605,1661 h40 r270
  text "D0/RX" at 101,1577 h40 r270
  text "GND" at 605,1568 h40 r270
  text "RST" at 99,1462 h40 r270
  text "RST" at 605,1460 h40 r270
  text "GND" at 99,1367 h40 r270
  text "5V" at 605,1342 h40 r270
  text "A7" at 605,1251 h40 r270
  text "D2" at 99,1248 h40 r270
  text "D3" at 99,1154 h40 r270
  text "A6" at 605,1153 h40 r270
  text "D4" at 99,1053 h40 r270
  text "A5" at 605,1051 h40 r270
  text "A4" at 605,953 h40 r270
  text "D5" at 99,952 h40 r270
  text "A3" at 605,852 h40 r270
  text "D6" at 99,851 h40 r270
  text "A2" at 605,752 h40 r270
  text "D7" at 99,751 h40 r270
  text "D8" at 99,652 h40 r270
  text "A1" at 605,652 h40 r270
  text "D9" at 99,553 h40 r270
  text "A0" at 605,549 h40 r270
  text "REF" at 605,463 h40 r270
  text "D10" at 99,461 h40 r270
  text "3V3" at 605,360 h40 r270
  text "D11" at 99,359 h40 r270
  text "D12" at 99,249.74 h40 r270
  text "D13" at 605,250 h40 r270
Bottom Overlay:
  drawing of 787 lines, arcs and shapes, not listed
  text "www.st.com/stm32nucleo" at 166,1506 h38 r90
  text "MB1180 Rev C" at 532,890 h36
  text "IDD" at 495.75,223 h50
Mechanical 1:
  text "MB1180B" at 32,1997 h40
Drill Drawing:
  rectangle: 2369.54,990.07 3013.54,1007.07
  rectangle: 2369.54,1130.14 3013.54,1147.14
  rectangle: 2368.78,734.52 3012.78,751.52
  rectangle: 2368.78,874.59 3012.78,891.59
  lines w5: 0,0 0,1980 730,1980 730,0 0,0
  lines w7: 2552.14,922.42 2414.14,922.42 2414.14,961.42 2591.14,961.42 ; 2591.14,922.42 2768.14,922.42 ; 2650.14,961.42 2788.14,961.42 ; 2808.14,922.42 2965.14,922.42 2965.14,961.42 2847.14,961.42
  lines w8: 2416.94,470.57 2994.08,470.57 ; 2416.94,553.07 2993.3,553.07
  lines w10: 1631.39,1387.82 3294.39,1387.82 ; 2401.69,790.59 2968.62,790.59 ; 2401.69,835.52 2968.62,835.52 ; 2402.45,1046.14 2969.38,1046.14 ; 2402.45,1091.07 2969.38,1091.07 ; 1143,399 1143,1522 3766,1522 3766,399 1143,399
  text ".legend" at 805,1586 h40
  text "Layer Stack Up Detail for: Nucleo_32.PcbDoc" at 1680,1431 h49.21
  text "4 LAYER BUILD" at 2066,1245 h49.21
  text "1.4mil" at 3270.81,1124.38 h49.21
  text "TOP LAYER" at 1640.24,1107.33 h49.21
  text "3.8mil" at 3042.9,1050.52 h49.21
  text "GND" at 1640.24,989.22 h49.21
  text "1.4mil" at 3276.72,982.65 h49.21
  text "49.8mil" at 3048.37,923.59 h49.21
  text "POWER" at 1640.24,851.43 h49.21
  text "1.4mil" at 3274.75,836.98 h49.21
  text "3.8mil" at 3046.83,794.61 h49.21
  text "1.4mil" at 3270.81,720.83 h49.21
  text "BOTTOM LAYER" at 1640.24,713.63 h49.21
  text "63mil" at 2473,491 h49.21
  text "(plus soldermask thickness)" at 2804.71,489.5 h49.21
  text "TOTAL BOARD THICKNESS: APPROX" at 1191.77,488.95 h49.21
  text "Notes:" at 1160,324 h40
  text "Silkscreen color : Blue ink PANTONE 2955" at 1220,254 h35
  text "Solder resist color : White" at 1220,194 h35
  text "Plating type : lead Gold" at 1220,134 h35

## Dimensions
0,0 to 65,62 on Drill Drawing
65,61 to 665,63 on Drill Drawing
0,1980 to 0,0 on Drill Drawing
0,1980 to 730,1980 on Drill Drawing

## Text inside footprints (layer, text, board x,y; h text height)
CN1: Mechanical 1 "Board edge" at 145,1973.66 h7.87 r180